# Altium PCB Player.PcbDoc (part 3 of 6)
Units mil, origin at the board's own origin, x right, y up, seen from the top; angles counter-clockwise.
Board outline 2992.13 x 3937.01 mil, 6 copper layers (Top Layer, Mid-Layer 1, Mid-Layer 2, Mid-Layer 3, Mid-Layer 4, Bottom Layer), stack 60.567 mil thick; 284 components, 323 nets, 1590 pads, 1045 vias.
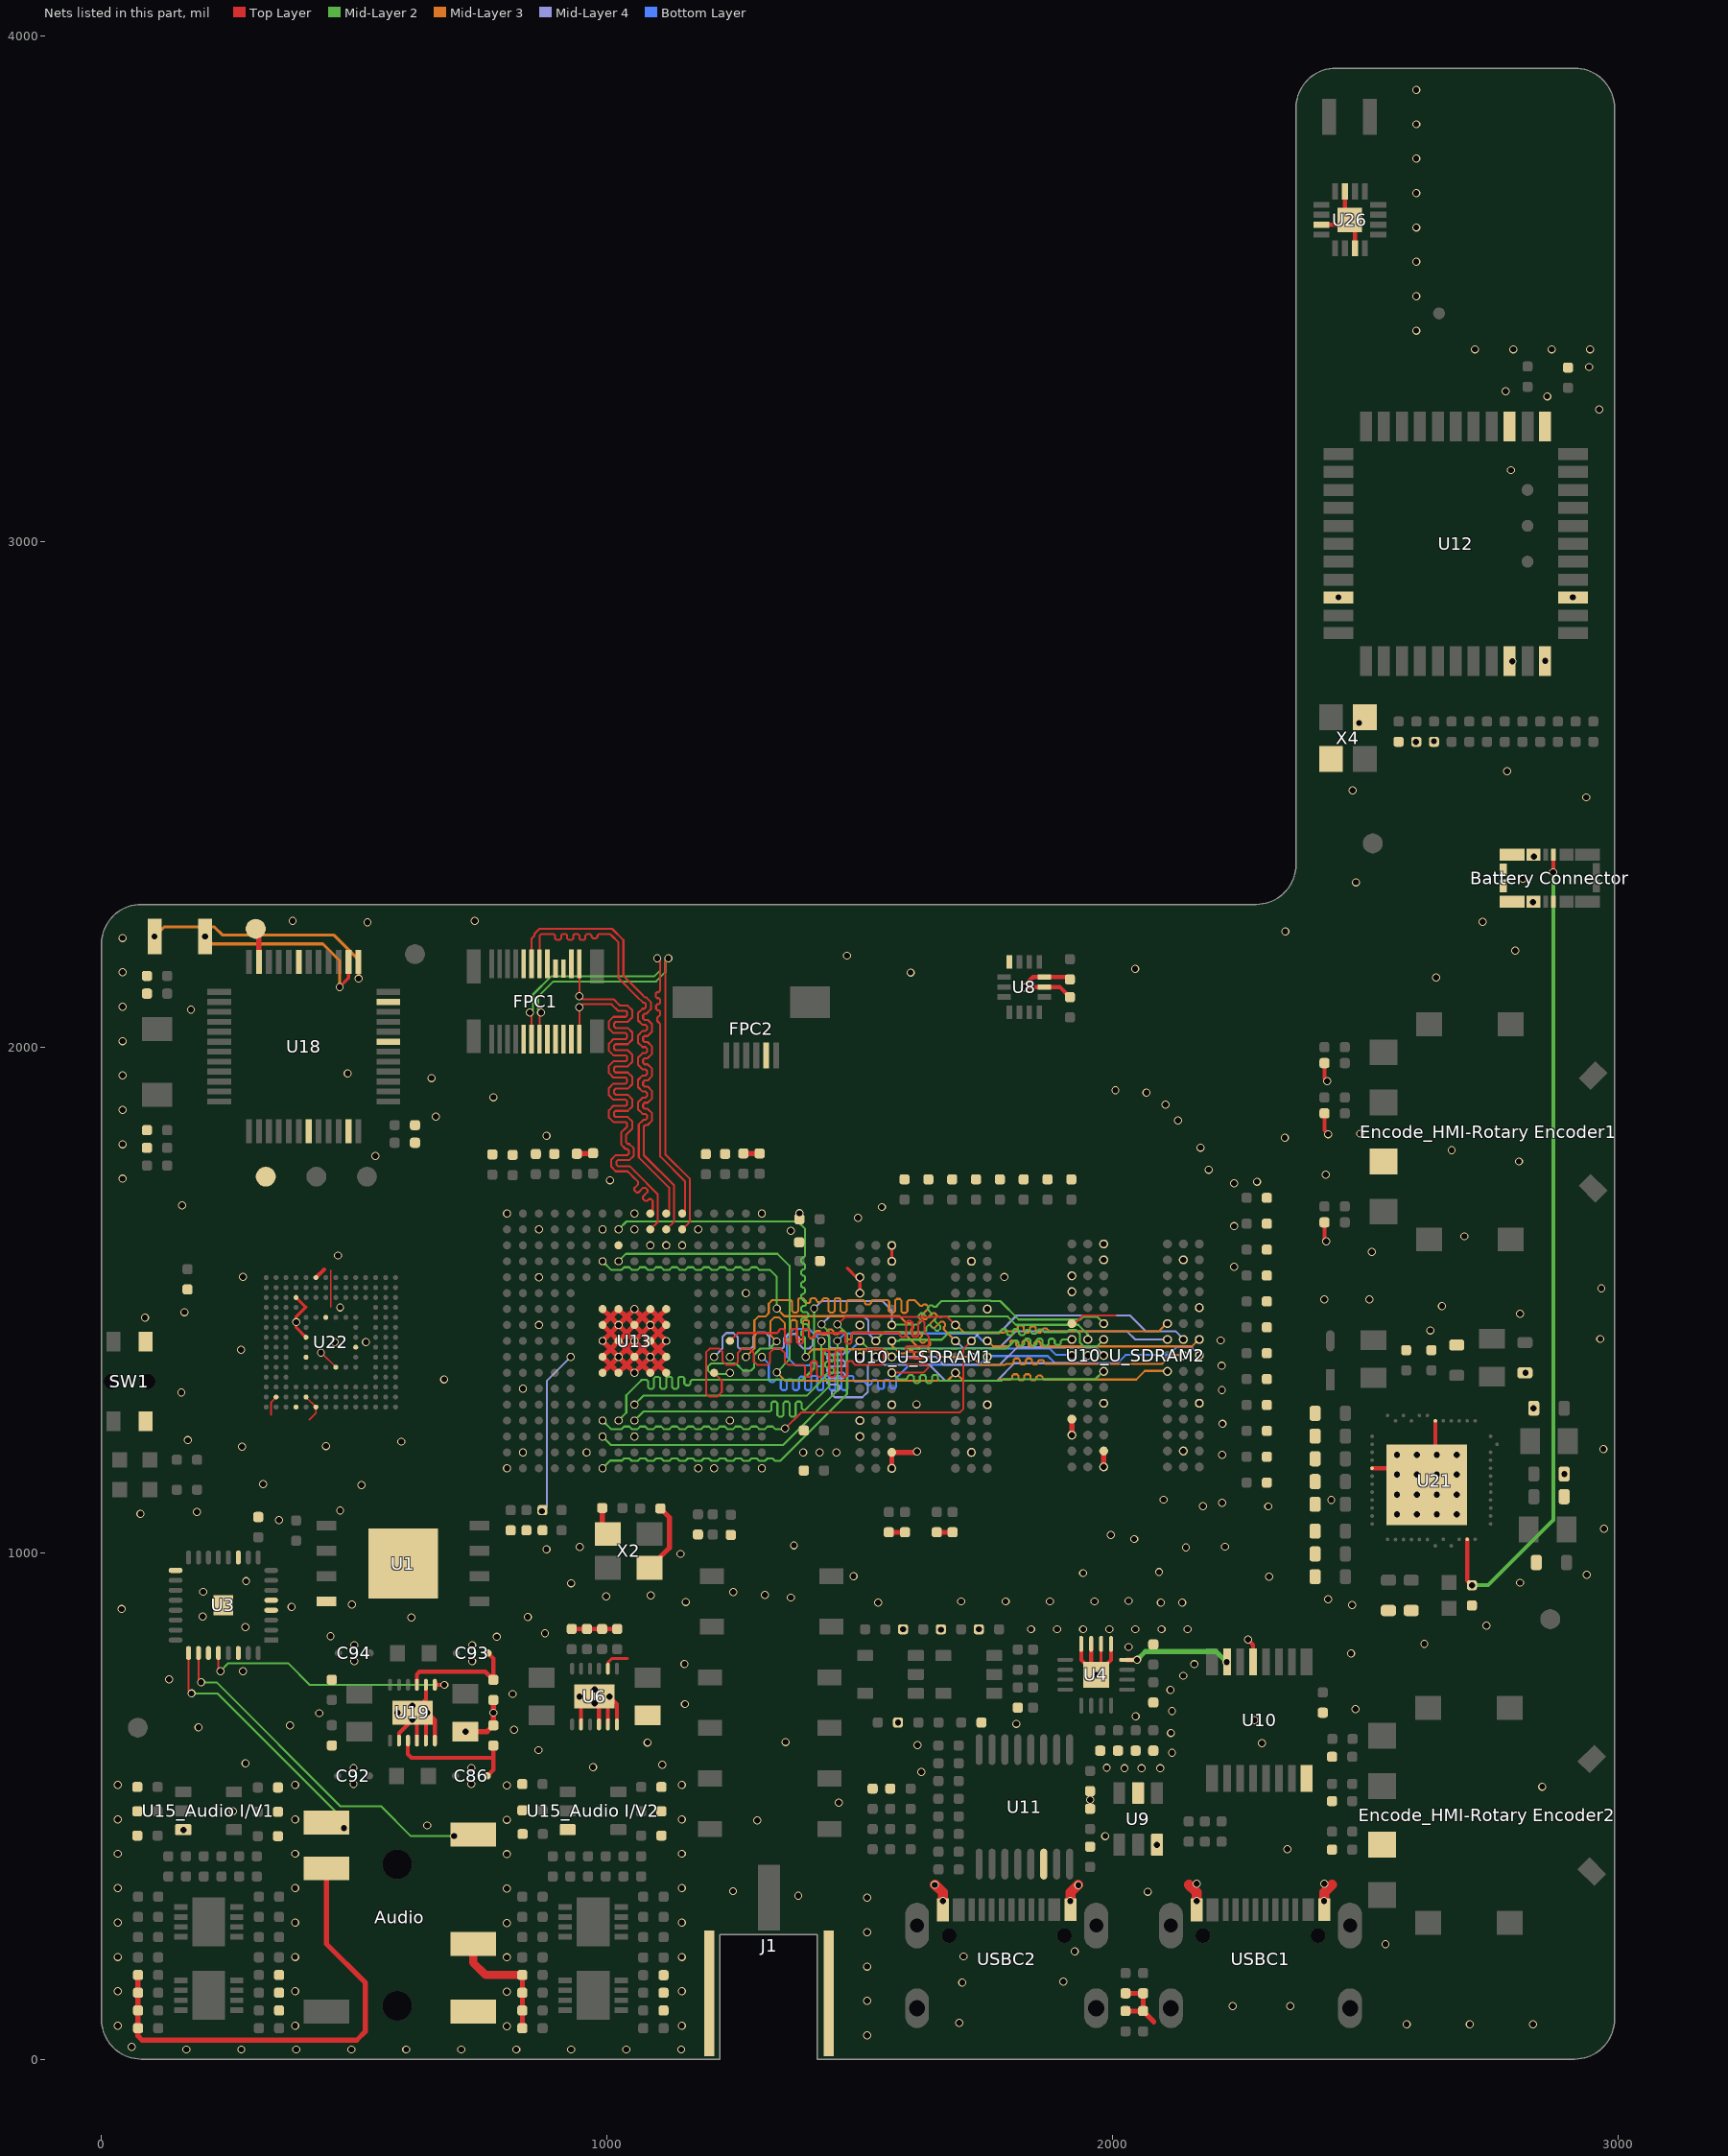
[diagram p7: the nets of this part, all layers, seen from the top]

## Via types
v1: diameter 16, hole 12, Top Layer to Bottom Layer, tented both sides, 1045 vias

## Nets (pads, with @x,y where several pads share a name; then routed paths per layer and width w, separated by ;. In a path a pad name is that pad's centre, name@x,y a point inside that pad or via, vN(x,y) a via of type N, cw(c..) or ccw(c..) an arc to the next point about the centre after c; other vN are vias at no path point) (continued)
Audio_RT1: "Battery Connector.7" "Battery Connector.8" "Battery Connector.11" "Battery Connector.12" "Battery Connector.15" "Battery Connector.16" "C1_HMI-Rotary Encoder1.2" "C1_HMI-Rotary Encoder2.2" "C2_HMI-Rotary Encoder1.2" "C2_HMI-Rotary Encoder2.2" "C3_HMI-Rotary Encoder1.2" "C3_HMI-Rotary Encoder2.2" "C40_Audio I/V1.2" "C40_Audio I/V2.2" "C53_Audio I/V1.2" "C53_Audio I/V2.2" "C72_Audio I/V1.2" "C72_Audio I/V2.2" "C73_Audio I/V1.1" "C73_Audio I/V2.1" "C77_Audio I/V1.1" "C77_Audio I/V2.1" "C78_Audio I/V1.1" "C78_Audio I/V2.1" "C83_Audio I/V1.1" "C83_Audio I/V2.1" "C84_Audio I/V1.1" "C84_Audio I/V2.1" "Encode_HMI-Rotary Encoder1.C" "Encode_HMI-Rotary Encoder2.C" "R65_Audio I/V1.2" "R65_Audio I/V2.2" "U15_Audio I/V1.3" "U15_Audio I/V2.3" Audio.1 C1.2 C2.2 C3.2 C4.2 C5.2 C6.2 C7.2 C8.2 C9.2 C10.1 C11.1 C12.1 C13.1 C14.1 C15.2 C16.1 C16_U_SDRAM1.2 C16_U_SDRAM2.2 C17.1 C17_U_SDRAM1.2 C17_U_SDRAM2.2 C18.1 C18_U_SDRAM1.2 C18_U_SDRAM2.2 C19.2 C19_U_SDRAM1.2 C19_U_SDRAM2.2 C20_U_SDRAM1.2 C20_U_SDRAM2.2 C21.1 C21_U_SDRAM1.2 C21_U_SDRAM2.2 C22.1 C22_U_SDRAM1.2 C22_U_SDRAM2.2 C23.1 C23_U_SDRAM1.2 C23_U_SDRAM2.2 C24_U_SDRAM1.2 C24_U_SDRAM2.2 C25.1 C25_U_SDRAM1.2 C25_U_SDRAM2.2 C26.1 C26_U_SDRAM1.2 C26_U_SDRAM2.2 C27_U_SDRAM1.2 C27_U_SDRAM2.2 C28.1 C29.1 C30.1 C31.2 C33.2 C34.1 C35.1 C36.1 C37.1 C38.1 C39.1 C41.2 C42.2 C43.2 C44.2 C45.2 C46.2 C47.2 C48.2 C49.2 C50.2 C51.2 C52.2 C54.2 C55.1 C56.1 C57.2 C58.1 C59.1 C60.1 C61.2 C62.2 C63.2 C64.1 C65.2 C66.2 C67.2 C68.1 C69.1 C70.1 C71.2 C79.1 C80.1 C81.1 C82.1 C86.2 C92.2 C93.2 C94.2 C95.2 FPC1.5 FPC1.8 FPC1.11 FPC1.14 FPC1.17 FPC1.20 FPC2.2 J1.2 J1.3 L7.2 L8.2 R2.2 R4.1 R7.1 R11.2 R12.1 R13.1 R14.2 R15.2 R16.2 R45.2 R48.1 R49.1 R51.2 R53.1 R64.1 SW1.2 SW1.3 TP4.1 TP7.1 U1.0 U1.4 U3.4 U3.5 U3.11 U3.17 U3.27 U3.30 U3.33 U4.13 U4.14 U4.15 U4.16 U4.17 U6.2 U6.4 U6.5 U6.6 U6.8 U6.13 U8.6 U8.7 U8.11 U9.2 U9.6 U10.8 U10.13 U10_U_SDRAM1.A3 U10_U_SDRAM1.B3 U10_U_SDRAM1.B8 U10_U_SDRAM1.C1 U10_U_SDRAM1.D1 U10_U_SDRAM1.E9 U10_U_SDRAM1.F1 U10_U_SDRAM1.L3 U10_U_SDRAM1.L9 U10_U_SDRAM1.M1 U10_U_SDRAM1.N1 U10_U_SDRAM1.P3 U10_U_SDRAM1.P8 U10_U_SDRAM1.R3 U10_U_SDRAM2.A3 U10_U_SDRAM2.B3 U10_U_SDRAM2.B8 U10_U_SDRAM2.C1 U10_U_SDRAM2.D1 U10_U_SDRAM2.E9 U10_U_SDRAM2.F1 U10_U_SDRAM2.L3 U10_U_SDRAM2.L9 U10_U_SDRAM2.M1 U10_U_SDRAM2.N1 U10_U_SDRAM2.P3 U10_U_SDRAM2.P8 U10_U_SDRAM2.R3 U11.14 U12.1 U12.3 U12.20 U12.31 U12.33 U12.36 U13.A1 U13.A17 U13.B2 U13.B6 U13.C10 U13.C13 U13.C16 U13.F2 U13.G7 U13.G8 U13.G9 U13.G10 U13.G11 U13.G16 U13.H7 U13.H8 U13.H9 U13.H10 U13.H11 U13.J3 U13.J7 U13.J8 U13.J9 U13.J10 U13.J11 U13.J16 U13.J17 U13.K7 U13.K8 U13.K9 U13.K10 U13.K11 U13.K15 U13.L7 U13.L8 U13.L9 U13.L10 U13.L11 U13.L15 U13.M15 U13.N1 U13.N16 U13.P1 U13.R4 U13.R8 U13.T12 U13.U1 U13.U17 U18.19 U18.23 U18.35 U18.47 U19.2 U19.4 U19.5 U19.6 U19.8 U19.13 U21.30 U21.41 U21.49 U22.A6 U22.C4 U22.E7 U22.G5 U22.H10 U22.J5 U22.K8 U22.N2 U22.N5 U22.P4 U22.P6 U26.3 U26.11 U26.15 U26.17 USBC1.A1 USBC1.A12 USBC1.B1 USBC1.B12 USBC2.A1 USBC2.A12 USBC2.B1 USBC2.B12 X2.2 X2.4 X4.2 X4.4 | length 4534.4
  Top Layer w3.5: 335.43,1273.68 335.43,1299.33 U22.N2@345.32,1309.22 ; U22.N5@404.37,1309.22 U22.P6@424.06,1289.53 424.06,1277.06 411,1264 ; v1(434,1397) 434.7,1397 U22.K8@463.43,1368.27 ; 453.56,1486.95 453.56,1559.57
  Top Layer w4: U10_U_SDRAM2.F1@1918.98,1454.48 1924.82,1454.48 1940.64,1470.3 2005.58,1470.3
  Top Layer w6: U22.C4@384.69,1506.07 403.76,1487 404,1487 385,1468 385,1446.7 U22.G5@404.37,1427.33 ; X2.4@1001.45,1036.4 X2.4@1003.35,1038.29 ; U6.8@1001.57,772.13 1001.57,784.57 1008.87,791.87 1040.04,791.87 ; 1475,1564 1492.86,1546.14 v1(1499.8,1546.14) v1(1499.8,1514.64) ; v1(1562.79,1577.64) v1(1562.79,1609.13) ; U4.17@1976.85,769.84 U4.14@1976.85,821.02
  Top Layer w8: U22.A6@424.06,1545.44 440.39,1561.76 ; U19.2@588.43,629.88 588.43,644.65 v1(615,671.22) 623.86,662.36 U19.4@623.86,629.88 ; U19.13@615,685 641.57,711.57 U19.8@641.57,740.12 ; U19.5@641.57,629.88 U19.13@641.57,682.05 ; v1(644.53,685) 659.29,670.24 U19.6@659.29,629.88 ; C38.1@929.96,850.59 C37.1@959.96,850.59 C55.1@1019.96,850.59 ; U6.2@948.43,661.89 U6.13@948.43,714.05 ; v1(975,703.23) 983.86,694.37 U6.4@983.86,661.89 ; U6.5@1001.57,661.89 U6.13@1001.57,714.05 ; v1(1004.53,717.01) 1019.29,702.24 U6.6@1019.29,661.89 ; C56.1@1915,2100 1895,2119.99 U8.6@1864.86,2119.99 1826.41,2119.99 v1(1825.02,2118.6) 1825.02,2122.46 1842.25,2139.68 U8.7@1864.86,2139.68 1910.32,2139.68 C58.1@1915,2135 ; U4.16@1937.48,821.02 1937.48,789.53 1957.17,769.84 U4.15@1957.17,821.02 ; U4.17@1976.85,769.84 1996.54,789.53 U4.13@1996.54,821.02 ; v1(2267.07,829.42) 2277.2,819.29 U10.13@2277.2,785.16 ; U26.15@2412.8,3627.32 2459.06,3627.32 U26.17@2468.9,3637.17 ; 2418.54,1870.04 2418.54,1836.46 v1(2426,1829) ; 2418.58,1654.53 2418.58,1620.42 v1(2422,1617) ; 2418.58,1969.49 2418.58,1939.42 v1(2424,1934) ; U26.11@2459.06,3693.27 2459.06,3647.01 U26.17@2468.9,3637.17 ; U26.3@2478.74,3581.06 2478.74,3627.32 U26.17@2468.9,3637.17 ; U21.41@2512.76,1168.5 U21.49@2549.17,1168.5 ; U21.49@2621.02,1136.02 2637.76,1152.76 U21.30@2637.76,1262.01
  Top Layer w10: TP7.1@305,2235 311.42,2228.58 U18.47@311.42,2169.33 ; v1(720,647.6) 762.6,647.6 C82.1@775,660 C81.1@775,710 ; C44.2@940,1790.22 940.5,1790.72 971.5,1790.72 C42.2@972,1791.22 ; C54.2@990.29,1089.83 990.29,1048.95 X2.4@1000.95,1038.29 ; U13.G7@990.95,1357.17 1006.69,1372.91 ; U13.G11@990.95,1483.15 1006.69,1467.4 ; X2.2@1083.63,971.36 1123.27,1011 1123.27,1070.85 C57.2@1105.29,1088.83 ; U13.L7@1116.93,1357.17 1101.18,1372.91 ; U13.L11@1116.93,1483.15 1101.18,1467.4 ; C41.2@1269.45,1790.83 C46.2@1301.45,1790.83 C46.2@1300.95,1791.33 ; C50.2@1557,1041.78 C49.2@1589,1041.78 ; v1(1562.79,1168.19) U10_U_SDRAM1.P3@1562.79,1199.68 1610.98,1199.68 v1(1612.67,1201.37) ; C52.2@1652,1041.78 C51.2@1683,1041.78 ; v1(1918.98,1234.01) U10_U_SDRAM2.M1@1918.98,1265.51 ; v1(1981.97,1171.02) U10_U_SDRAM2.P3@1981.97,1202.51 ; R16.2@2025,95 R15.2@2060,95 ; R11.2@2025,130 R14.2@2060,130 R15.2@2060,95 ; 2080.83,73.44 2080.83,74.17 R15.2@2060,95 ; 1006.69,1372.91 v1(1022.44,1388.66) ; 1006.69,1372.91 U13.H7@1022.44,1357.17 1038.19,1372.91 ; 1006.69,1372.91 U13.G8@990.95,1388.66 1006.69,1404.41 ; 1006.69,1404.41 v1(990.95,1420.16) 1006.69,1435.91 ; 1006.69,1404.41 U13.H9@1022.44,1420.16 ; 1006.69,1404.41 v1(1022.44,1388.66) ; 1006.69,1435.91 U13.G10@990.95,1451.65 1006.69,1467.4 ; 1006.69,1435.91 v1(1022.44,1451.65) ; 1006.69,1435.91 U13.H9@1022.44,1420.16 ; 1006.69,1467.4 U13.H11@1022.44,1483.15 1038.19,1467.4 ; 1006.69,1467.4 v1(1022.44,1451.65) ; v1(1022.44,1388.66) 1038.19,1404.41 ; v1(1022.44,1388.66) 1038.19,1372.91 ; U13.H9@1022.44,1420.16 1038.19,1435.91 ; U13.H9@1022.44,1420.16 1038.19,1404.41 ; v1(1022.44,1451.65) 1038.19,1467.4 ; v1(1022.44,1451.65) 1038.19,1435.91 ; 1038.19,1372.91 U13.J8@1053.94,1388.66 ; 1038.19,1372.91 v1(1053.94,1357.17) 1069.69,1372.91 ; 1038.19,1404.41 v1(1053.94,1420.16) ; 1038.19,1404.41 U13.J8@1053.94,1388.66 ; 1038.19,1435.91 U13.J10@1053.94,1451.65 ; 1038.19,1435.91 v1(1053.94,1420.16) ; 1038.19,1467.4 v1(1053.94,1483.15) 1069.69,1467.4 ; 1038.19,1467.4 U13.J10@1053.94,1451.65 ; U13.J8@1053.94,1388.66 1069.69,1404.41 ; U13.J8@1053.94,1388.66 1069.69,1372.91 ; v1(1053.94,1420.16) 1069.69,1435.91 ; v1(1053.94,1420.16) 1069.69,1404.41 ; U13.J10@1053.94,1451.65 1069.69,1467.4 ; U13.J10@1053.94,1451.65 1069.69,1435.91 ; 1069.69,1372.91 v1(1085.43,1388.66) ; 1069.69,1372.91 U13.K7@1085.43,1357.17 1101.18,1372.91 ; 1069.69,1404.41 U13.K9@1085.43,1420.16 ; 1069.69,1404.41 v1(1085.43,1388.66) ; 1069.69,1435.91 v1(1085.43,1451.65) ; 1069.69,1435.91 U13.K9@1085.43,1420.16 ; 1069.69,1467.4 U13.K11@1085.43,1483.15 1101.18,1467.4 ; 1069.69,1467.4 v1(1085.43,1451.65) ; v1(1085.43,1388.66) 1101.18,1404.41 ; v1(1085.43,1388.66) 1101.18,1372.91 ; U13.K9@1085.43,1420.16 1101.18,1435.91 ; U13.K9@1085.43,1420.16 1101.18,1404.41 ; v1(1085.43,1451.65) 1101.18,1467.4 ; v1(1085.43,1451.65) 1101.18,1435.91 ; 1101.18,1372.91 U13.L8@1116.93,1388.66 1101.18,1404.41 ; 1101.18,1404.41 v1(1116.93,1420.16) 1101.18,1435.91 ; 1101.18,1435.91 U13.L10@1116.93,1451.65 1101.18,1467.4
  Top Layer w20: v1@1648.35,344.68 1663.68,329.35 USBC2.A1@1663.68,295.51 ; USBC2.A12@1916.33,295.51 1916.33,329.35 v1@1931.66,344.68 ; 2150.27,344.68 2165.6,329.35 USBC1.A1@2165.6,295.51 ; USBC1.A12@2418.26,295.51 2418.26,329.35 2433.59,344.68
  Mid-Layer 2 w6: v1@864.71,1451.65 v1(864.96,1451.65)
  other v1: 167.78,19 276.52,19 385.26,19 494,19 602.74,19 711.48,19 820.22,19 928.96,19 1037.69,19 1146.43,19 60,24 1514,47 801.77,65.28 32,66 382.88,66 1147.57,66 2581,69 2706,69 2831,69 1696.46,71.94 2237,105 2351,105 1514,115 801.77,133.28 32,134 382.88,134 1147.57,134 1702.26,151.2 1902,153 1514,183 801.77,201.28 32,202 382.88,202 1147.57,202 1705,203 1924.5,212.96 2539.09,227.33 1514,251 801.77,269.28 32,270 382.88,270 1147.57,270 1663.87,312.59 1915.84,312.65 2165.8,312.59 2417.77,312.65 1514,319 1378,323 2069,331 1249,332 801.77,337.28 32,338 382.88,338 1147.57,338 1931.86,344.05 1647.95,344.55 2166.09,346.87 2418.06,346.81 801.77,405.28 32,406 382.88,406 1147.57,406 2345,415 2087.4,423.82 1985,441 162,453 644,462 1297,472 801.77,473.28 32,474 382.88,474 1147.57,474 260,490 1458,507 1955,513 2849.27,538.72 801.77,541.28 32,542 382.88,542 1147.57,542 498.5,544.25 731.5,544.25 1621,568 2023,575 2057,575 2094,575 498.5,575.75 731.5,575.75 1988,576 972,577 1109,582 285,585 2117,606 864,611 1614,621 2295,625 1080,626 1353,627 2115,645 816,651 192,656 373,660 1809,663 1575.2,665.59 2280,670 2045,678 431,684 585.47,685 775,685 2117,688 2480,692 615,698.78 1154,702 945.47,717.01 813,722 2114,730 975,730.79 134,751 2139,758 1967.01,760 279.79,766.9 1153,781 2160.98,780.89 500,787.13 732.99,787.13 2471,802 2031,815 500,818.62 732.99,818.62 2616,821 782,835 453,836 877,842 1659.91,848.98 1585,850 1735,850 1838.2,850 1889.8,850 1941.39,850 1992.99,850 2044.59,850 2096.19,850 2147.79,850 284.69,854.1 2739,857 613,873 843,874 200,875 40,890 376,894 2473,898 495,899 1535.67,902.63 2095,903 2136.97,902.63 1155.33,904.03 1700,905.01 1787.92,905.01 1875.84,905.01 1963.76,905.01 2031,906 2425.87,909.03 1363.35,912.71 998,915 1086,917 1312,918 201,924 1249.47,923.37 929,941 2805,942 286,945 2309,954 1487.16,954.88 2937,958 1941.34,961.09 2091.31,963.06 1145,999 880,1008 2144.49,1011.69 946,1013 2221.78,1013.2 1369.49,1015.94 2042.13,1028.42 1995.87,1036.3 2971,1049 351,1066 2561.97,1076.97 2601.34,1076.97 2640.71,1076.97 2680.08,1076.97 77.24,1078.35 189,1082 472,1085 2307.58,1092.94 2177.95,1093.39 2216.34,1100.28 2100.2,1106.18 2432,1105.9 2561.97,1116.34 2601.34,1116.34 2640.71,1116.34 2680.08,1116.34 514,1135 320,1137 2561.97,1155.71 2601.34,1155.71 2640.71,1155.71 2680.08,1155.71 2893,1157 801.97,1168.19 1179.92,1168.19 1211.42,1168.19 1305.91,1168.19 2216.34,1194.76 2561.97,1195.08 2601.34,1195.08 2640.71,1195.08 2680.08,1195.08 833.46,1199.68 959.45,1199.68 1387.6,1199.68 1420.08,1199.68 1453.54,1199.68 1720.27,1199.68 2139.45,1202.51 2970,1206 278,1211 444.26,1212.27 592.83,1220.94 171.06,1223.98 1053.94,1231.18 1499.8,1231.18 2216.67,1256.19 1242.91,1262.68 1499.8,1262.68 2832,1287 1562.79,1294.17 1751.76,1294.17 1611.71,1294.83 1981.97,1297 2170.94,1297 158,1318 2215.7,1322.76 833.46,1325.67 677.76,1344.19 2816,1357 2215.35,1370.94 1242.91,1388.66 275.8,1402.77 461,1418 523.07,1417.61 2213.39,1421.14 2964,1424 2628,1441 1499.8,1451.65 385,1457.35 86,1466 2805,1474 164,1477 1751.76,1483.15 2170.94,1485.98 472.02,1486.47 2651,1489 2418,1502 2507.35,1502.28 1274.41,1514.65 1918.98,1517.47 2966,1524 864.96,1546.14 280,1547 1785.24,1546.5 1918.98,1548.97 2240,1567.01 1720.27,1577.64 1981.97,1580.47 2139.45,1580.47 468,1589 2512,1596 1085.43,1609.13 1116.93,1609.13 1148.43,1609.13 1981.97,1611.96 2695,1627 1363.12,1637.83 864.96,1640.63 990.95,1640.63 1053.94,1640.63 1179.92,1640.63 2240,1647.01 1495.87,1663.27 801.97,1672.13 1053.94,1672.13 1305.91,1672.13 1380.36,1672.63 1543.11,1684.92 159.08,1688.19 2240,1732.01 2285,1735 1005.44,1737.89 42,1741 2421,1749 2189.76,1758.74 2803,1775 542,1786 2670,1797 2173.54,1802.44 42,1809 2340,1822 880,1826 2489,1830 2129.05,1856.01 661,1864 42,1877 2104.13,1887.68 775,1902 2066.59,1910.93 2005,1916 653,1940 42,1945 487,1949 42,2013 177,2075 42,2081 2639,2139 42,2149 1600.1,2148.65 2044,2156 1474,2182 2796,2192 42,2217 2341,2230 526,2248 2731,2249 378,2251 738,2251 2831,2288 2481,2327 2811,2334 2833,2378 2936,2495 2474,2509 2779.61,2546.51 2599.46,2604.8 2635,2606 2487,2642 2790.21,2764.19 2855,2764.71 2446.13,2890.58 2909.87,2890.58 2787,3142 2962,3262 2859,3288 2777,3298 2942,3346 2716,3381 2792,3381 2868,3381 2944,3381 2600,3418 2600,3486 2600,3554 2600,3622 2600,3690 2600,3758 2600,3826 2600,3894
Audio_SW1: Audio.6 U3.25 | length 503.8
  Top Layer w4: U3.25@172.17,803.01 172.17,728.83 v1(178,723)
  Mid-Layer 2 w4: v1(178,723) 229.78,723 479.68,473.09 v1(479.68,456.91)
Audio_SW2: Audio.5 U3.26 | length 686.1
  Top Layer w4: U3.26@191.86,803.01 191.86,750.14 v1(197,745)
  Mid-Layer 2 w4: v1(197,745) 227.78,745 472.78,500 553,500 612,441 v1(697,441)
Audio_VO1: "C76_Audio I/V1.1" "R56_Audio I/V1.2" "R57_Audio I/V1.2" "R61_Audio I/V1.1" Audio.4 | length 935
  Top Layer w10: 72.28,166.18 72.28,131.18 72.28,96.18 72.28,61.18 72.28,45.72 80.51,37.49 504.78,37.49 522,54.71 522,151 445,228 Audio.4@445,377.12
Audio_VO2: "C76_Audio I/V2.1" "R56_Audio I/V2.2" "R57_Audio I/V2.2" "R61_Audio I/V2.1" Audio.3 | length 249.1
  Top Layer w10: 832.28,61.18 832.28,96.18 832.28,131.18 832.28,166.18
  Top Layer w16: Audio.3@735,227.52 735,191 759.82,166.18 832.28,166.18
AudioPWR_EN: U3.28 U19.7 | length 523.8
  Top Layer w4: U3.28@231.24,803.01 231.24,770.76 v1(235,767)
  Top Layer w8: U19.7@659.29,740.12 677.88,740.12 v1(678,740)
  Mid-Layer 2 w4: v1(235,767) 251,783 369,783 412,740 v1(678,740)
BATT_ID: "Battery Connector.4"
BATT_TS: "Battery Connector.3" R2.1 U21.11 | length 1624.4
  Top Layer w8: U21.11@2700.75,1027.76 2700.75,946.26 R2.1@2710,937.01 ; 2870.94,2382.01 2870.94,2347.06 v1(2871,2347)
  Mid-Layer 2 w8: v1(2710.59,937.13) 2742.13,937.13 2871,1066 v1(2871,2347)
BOOT: R7.2 U13.E8 | length 328.7
  Mid-Layer 4 w4: v1(871.14,1083.51) 881,1093.37 881,1341.71 v1(927.95,1388.66)
Connected_LED: U18.43
COV_EN: U4.12 U10.15 | length 212.6
  Top Layer w10: U4.12@2028.03,789.53 2047.72,789.53 v1(2047.81,789.44)
  Mid-Layer 2 w10: v1(2047.81,789.44) 2064.38,806 2204,806 v1(2225,785)
DBG_CLK: TP6.1 U18.38 | length 394.5
  Top Layer w6: v1(471,2120) 488.58,2137.58 U18.38@488.58,2169.33
  Mid-Layer 3 w6: v1(205,2220) 219.72,2205.28 437.72,2205.28 471,2172 v1(471,2120)
DBG_DIO: TP5.1 U18.37 | length 508.1
  Top Layer w6: U18.37@508.27,2169.33 508.27,2136.69 v1(508.37,2136.59)
  Mid-Layer 3 w6: v1(105,2220) 124,2239 223,2239 239,2223 459,2223 508.37,2173.63 v1(508.37,2136.59)
DCDC_VCC_Audio: C82.2 C86.1 U19.3 | length 263.8
  Top Layer w8: U19.3@606.14,629.88 606,629.74 606,603 613,596 775,596 ; C86.1@762.99,560 775,572.01 775,596 ; C82.2@775,620 775,596
DCDC_VEE_Audio: C81.2 C93.1 U19.9 | length 237.9
  Top Layer w8: U19.9@623.86,740.12 623.86,760.86 629,766 759,766 C81.2@775,750 775,792.36 C93.1@764.49,802.87
Debuger_LED: U18.31
DSI_CK_N: FPC1.18 U13.L17 | length 984.2
  Top Layer w4: FPC1.18@866.26,2166.14 866.26,2221.26 870,2225 880,2225 894,2225 897,2222 897,2216 900,2213 906,2213 909,2216 909,2222 912,2225 918,2225 921,2222 921,2216 924,2213 930,2213 933,2216 933,2222 936,2225 942,2225 945,2222 945,2216 948,2213 954,2213 957,2216 957,2222 960,2225 966,2225 969,2222 969,2219.31 972,2216.31 978,2216.31 981,2219.31 981,2222 984,2225 1005.86,2225 1009.91,2220.95 1022.07,2208.79 1022.07,2137.93 1025,2135 1059,2101 1070.83,2089.17 1073.58,2089.17 1076.58,2086.17 1076.58,2080.17 1073.58,2077.17 1069.86,2077.17 1061,2068.32 1061,2054.03 1069.86,2045.17 1075.82,2045.17 1078.82,2042.17 1078.82,2036.17 1075.82,2033.17 1069.86,2033.17 1061,2024.32 1061,2010.03 1069.86,2001.17 1075.82,2001.17 1078.82,1998.17 1078.82,1992.17 1075.82,1989.17 1069.86,1989.17 1061,1980.32 1061,1966.03 1069.86,1957.17 1075.82,1957.17 1078.82,1954.17 1078.82,1948.17 1075.82,1945.17 1069.86,1945.17 1061,1936.32 1061,1922.03 1069.86,1913.17 1075.82,1913.17 1078.82,1910.17 1078.82,1904.17 1075.82,1901.17 1069.86,1901.17 1061,1892.32 1061,1878.03 1069.86,1869.17 1075.82,1869.17 1078.82,1866.17 1078.82,1860.17 1075.82,1857.17 1071.46,1857.17 1062.6,1848.32 1062.6,1827.17 1062.6,1783.25 1122.47,1723.39 1122.47,1677.66 U13.L17@1116.93,1672.13
DSI_CK_P: FPC1.19 U13.L16 | length 994.1
  Top Layer w4: FPC1.19@850.51,2166.14 850.51,2215.51 856.26,2221.26 856.26,2225.4 865.86,2235 1010,2235 1032.07,2212.93 1032.07,2142.07 1067.04,2107.1 1074.97,2099.17 1077.73,2099.17 1086.58,2090.32 1086.58,2076.03 1077.73,2067.17 1074,2067.17 1071,2064.17 1071,2058.17 1074,2055.17 1079.97,2055.17 1088.82,2046.32 1088.82,2032.03 1079.97,2023.17 1074,2023.17 1071,2020.17 1071,2014.17 1074,2011.17 1079.97,2011.17 1088.82,2002.32 1088.82,1988.03 1079.97,1979.17 1074,1979.17 1071,1976.17 1071,1970.17 1074,1967.17 1079.97,1967.17 1088.82,1958.32 1088.82,1944.03 1079.97,1935.17 1074,1935.17 1071,1932.17 1071,1926.17 1074,1923.17 1079.97,1923.17 1088.82,1914.32 1088.82,1900.03 1079.97,1891.17 1074,1891.17 1071,1888.17 1071,1882.17 1074,1879.17 1079.97,1879.17 1088.82,1870.32 1088.82,1856.03 1079.97,1847.17 1075.6,1847.17 1072.6,1844.17 1072.6,1827.17 1072.6,1787.4 1132.47,1727.53 1132.47,1656.17 U13.L16@1116.93,1640.63
DSI_D0_N: FPC1.6 U13.M17 | length 942.8
  Top Layer w4: v1(847.39,2069.37) 850.51,2066.25 FPC1.6@850.51,2017.01 ; v1(1099,2177) 1105,2171 1105,2127 1105,2113 1102,2110 1098.97,2110 1095.97,2107 1095.97,2101 1098.97,2098 1102,2098 1105,2095 1105,2089 1102,2086 1099.58,2086 1096.58,2083 1096.58,2077 1099.58,2074 1102,2074 1105,2071 1105,2065 1102,2062 1099,2059 1099,2053 1102,2050 1105,2047 1105,2024 1105,1785 1153.82,1736.18 1153.82,1677.52 U13.M17@1148.43,1672.13
  Mid-Layer 2 w4: v1(847.39,2069.37) 853.39,2075.37 853.39,2105.14 889.24,2141 1092.72,2141 1105,2153.28 v1@1105,2177
DSI_D0_P: FPC1.7 U13.M16 | length 952.6
  Top Layer w4: FPC1.7@866.26,2017.01 866.26,2066.25 v1(869.39,2069.37) ; v1(1121,2177) 1115,2171 1115,1963.4 1115,1806.53 1115,1789.14 1163.82,1740.33 1163.82,1656.02 U13.M16@1148.43,1640.63
  Mid-Layer 2 w4: v1(869.39,2069.37) 863.39,2075.37 863.39,2101 893.39,2131 1096.86,2131 1115,2149.14 v1@1115,2177
DSI_D1_N: FPC1.12 U13.K17 | length 995.4
  Top Layer w4: FPC1.12@945,2017.01 v1(945,2080) 951,2086 1008.47,2086 1009.47,2085.01 1021.47,2073.01 1036.6,2073.01 1039.6,2070.01 1039.6,2064.01 1036.6,2061.01 1012.44,2061.01 1003.58,2052.15 1003.58,2037.87 1012.44,2029.01 1036.6,2029.01 1039.6,2026.01 1039.6,2020.01 1036.6,2017.01 1012.44,2017.01 1003.58,2008.15 1003.58,1993.87 1012.44,1985.01 1036.6,1985.01 1039.6,1982.01 1039.6,1976.01 1036.6,1973.01 1012.44,1973.01 1003.58,1964.15 1003.58,1949.87 1012.44,1941.01 1036.6,1941.01 1039.6,1938.01 1039.6,1932.01 1036.6,1929.01 1012.44,1929.01 1003.58,1920.15 1003.58,1905.87 1012.44,1897.01 1036.6,1897.01 1039.6,1894.01 1039.6,1888.01 1036.6,1885.01 1012.44,1885.01 1003.58,1876.15 1003.58,1861.87 1012.44,1853.01 1036.6,1853.01 1039.6,1850.01 1039.6,1844.01 1036.6,1841.01 1036.46,1841.01 1027.6,1832.15 1027.6,1821.44 1027.6,1817.57 1027.6,1808.5 1036.46,1799.64 1039.71,1799.64 1042.71,1796.64 1042.71,1790.64 1039.71,1787.64 1016.97,1787.64 1008.11,1778.79 1008.11,1764.5 1016.97,1755.64 1040.21,1755.64 1047.25,1748.61 1051.54,1744.31 1061.44,1734.42 1061.44,1730.17 1053.65,1722.38 1053.65,1718.13 1057.89,1713.89 1062.13,1713.89 1071.34,1723.1 1075.59,1723.1 1079.83,1718.86 1079.83,1714.62 1070.62,1705.41 1070.62,1701.16 1074.86,1696.92 1079.1,1696.92 1082.76,1700.58 1087,1700.58 1090,1697.58 1090,1686.17 1090,1676.69 U13.K17@1085.43,1672.13
DSI_D1_P: FPC1.13 U13.K16 | length 999
  Top Layer w4: FPC1.13@945,2166.14 v1(945,2102) 951,2096 1012.62,2096 1023.61,2085.01 1025.61,2083.01 1040.75,2083.01 1049.6,2074.15 1049.6,2059.87 1040.75,2051.01 1016.58,2051.01 1013.58,2048.01 1013.58,2042.01 1016.58,2039.01 1040.75,2039.01 1049.6,2030.15 1049.6,2015.87 1040.75,2007.01 1016.58,2007.01 1013.58,2004.01 1013.58,1998.01 1016.58,1995.01 1040.75,1995.01 1049.6,1986.15 1049.6,1971.87 1040.75,1963.01 1016.58,1963.01 1013.58,1960.01 1013.58,1954.01 1016.58,1951.01 1040.75,1951.01 1049.6,1942.15 1049.6,1927.87 1040.75,1919.01 1016.58,1919.01 1013.58,1916.01 1013.58,1910.01 1016.58,1907.01 1040.75,1907.01 1049.6,1898.15 1049.6,1883.87 1040.75,1875.01 1016.58,1875.01 1013.58,1872.01 1013.58,1866.01 1016.58,1863.01 1040.75,1863.01 1049.6,1854.15 1049.6,1839.87 1040.75,1831.01 1040.6,1831.01 1037.6,1828.01 1037.6,1821.44 1037.6,1817.57 1037.6,1812.64 1040.6,1809.64 1043.85,1809.64 1052.71,1800.79 1052.71,1786.5 1043.85,1777.64 1021.11,1777.64 1018.11,1774.64 1018.11,1768.64 1021.11,1765.64 1044.36,1765.64 1054.71,1755.29 1100,1710 1100,1655.2 U13.K16@1085.43,1640.63
DSI_D2_N: FPC1.9
DSI_D2_P: FPC1.10
DSI_D3_N: FPC1.15
DSI_D3_P: FPC1.16
FMC_A0: U10_U_SDRAM1.G8 U10_U_SDRAM2.G8 U13.G4 | length 1377.6
  Top Layer w4: v1(1352.17,1246.93) 1383.78,1278.55 1696.78,1278.55 1704.5,1286.28 1704.5,1404.39 v1(1720.27,1420.16)
  Mid-Layer 2 w4: v1(990.95,1262.68) 1007.68,1245.94 1028.83,1245.94 1033.71,1250.83 1043.83,1250.83 1048.71,1245.94 1060.32,1245.94 1065.2,1250.83 1075.32,1250.83 1079.03,1247.12 ; 1079.59,1246.56 1080.2,1245.94 1091.82,1245.94 1096.7,1250.83 1106.82,1250.83 1111.7,1245.94 1123.32,1245.94 1128.2,1250.83 1138.32,1250.83 1143.2,1245.94 1154.81,1245.94 1159.69,1250.83 1169.81,1250.83 1174.69,1245.94 1186.31,1245.94 1191.19,1250.83 1201.31,1250.83 1206.19,1245.94 1217.8,1245.94 1222.69,1250.83 1232.8,1250.83 1237.69,1245.94 1249.3,1245.94 1254.18,1250.83 1264.3,1250.83 1269.18,1245.94 1280.8,1245.94 1285.68,1250.83 1295.8,1250.83 1300.68,1245.94 1312.29,1245.94 1317.17,1250.83 1327.29,1250.83 1332.17,1245.94 1351.18,1245.94 v1(1352.17,1246.93)
  Mid-Layer 4 w4: v1(1720.27,1420.16) 1735.28,1435.16 1774.49,1435.16 1809.67,1470.35 2034.25,1470.35 2065.75,1438.86 ; 2065.75,1439.3 2124.11,1439.3 2139.45,1423.97 v1(2139.45,1422.99)
FMC_A1: U10_U_SDRAM1.G9 U10_U_SDRAM2.G9 U13.G3 | length 1399.7
  Mid-Layer 2 w4: v1(990.95,1231.18) 1007.68,1214.45 1348.23,1214.45 1455.51,1321.73 v1(1455.51,1420.16)
  Mid-Layer 3 w4: v1(1751.76,1420.16) 1752.75,1420.16 1763.61,1409.29 1792.13,1409.29 1794.13,1409.29 1797.13,1412.29 1797.13,1418.29 1800.13,1421.29 1806.13,1421.29 1809.13,1418.29 1809.13,1412.2 1812.13,1409.2 1818.13,1409.2 1821.13,1412.2 1821.13,1418.29 1824.13,1421.29 1830.13,1421.29 1833.13,1418.29 1833.13,1412.2 1836.13,1409.2 1842.13,1409.2 1845.13,1412.2 1845.13,1416.38 1848.13,1419.38 1854.13,1419.38 1857.13,1416.38 1857.13,1412.29 1860.13,1409.29 1898.43,1409.29 2156.26,1409.29 2169.95,1422.99 v1(2170.94,1422.99)
  Bottom Layer w4: v1(1455.51,1420.16) 1470.28,1434.92 1728.15,1434.92 1742.91,1420.16 v1(1751.76,1420.16)
FMC_A2: U10_U_SDRAM1.F7 U10_U_SDRAM2.F7 U13.G1 | length 1451.9
  Top Layer w4: v1(1455.51,1452.64) 1470.28,1467.4 1673.02,1467.4 v1(1688.77,1451.65)
  Mid-Layer 2 w4: v1(990.95,1168.19) 1006.2,1183.45 1029.32,1183.45 1033.71,1187.83 1043.83,1187.83 1048.71,1182.95 1060.32,1182.95 1065.2,1187.83 1075.32,1187.83 1079.03,1184.12 ; 1079.59,1183.57 1080.2,1182.95 1091.82,1182.95 1096.7,1187.83 1106.82,1187.83 1111.7,1182.95 1123.32,1182.95 1128.2,1187.83 1138.32,1187.83 1143.2,1182.95 1154.81,1182.95 1159.69,1187.83 1169.81,1187.83 1174.69,1182.95 1186.31,1182.95 1191.19,1187.83 1201.31,1187.83 1206.19,1182.95 1217.8,1182.95 1222.69,1187.83 1232.8,1187.83 1237.69,1182.95 1249.3,1182.95 1254.18,1187.83 1264.3,1187.83 1269.18,1182.95 1280.8,1182.95 1285.68,1187.83 1295.8,1187.83 1300.68,1182.95 1312.29,1182.95 1317.17,1187.83 1327.29,1187.83 1332.17,1182.95 1342.32,1182.95 1474.21,1314.84 1474.21,1433.94 v1(1455.51,1452.64)
  Mid-Layer 3 w4: v1(1688.77,1451.65) 1690.74,1451.65 1705.82,1436.57 1784.92,1436.57 1787.18,1438.83 1806.89,1438.83 1808.89,1438.83 1811.89,1441.83 1811.89,1447.83 1814.89,1450.83 1820.89,1450.83 1823.89,1447.83 1823.89,1439.58 1826.89,1436.58 1832.89,1436.58 1835.89,1439.58 1835.89,1445.86 1838.89,1448.86 1844.89,1448.86 1847.89,1445.86 1847.89,1439.58 1850.89,1436.58 1856.89,1436.58 1859.89,1439.58 1859.89,1441.84 1862.89,1444.84 1868.89,1444.84 1871.89,1441.84 1874.89,1438.83 1909.25,1438.83 2090.34,1438.83 2105.98,1454.48 v1(2107.95,1454.48)
FMC_A3: U10_U_SDRAM1.F3 U10_U_SDRAM2.F3 U13.H4 | length 1405.7
  Mid-Layer 2 w4: v1(1022.44,1262.68) 1037.92,1278.15 1037.92,1312.6 1063.71,1338.39 1068.7,1343.39 1077.71,1343.39 1080.71,1340.39 1080.71,1328.56 1083.71,1325.56 1089.71,1325.56 1092.71,1328.56 1092.71,1346.39 1095.71,1349.39 1101.71,1349.39 1104.71,1346.39 1104.71,1328.56 1107.71,1325.56 1113.71,1325.56 1116.71,1328.56 1116.71,1346.39 1119.71,1349.39 1125.71,1349.39 1128.71,1346.39 1128.71,1328.56 1131.71,1325.56 1137.71,1325.56 1140.71,1328.56 1140.71,1346.39 1143.71,1349.39 1149.71,1349.39 1152.71,1346.39 1152.71,1335.46 1155.71,1332.46 1161.71,1332.46 1164.71,1335.46 1164.71,1340.39 1167.71,1343.39 1213.71,1343.39 1386.61,1343.39 1409.25,1366.02 v1(1409.25,1484.13) ; v1(1562.79,1451.65) 1563.78,1452.63 1615.14,1452.63 1618.99,1456.48 1620.41,1457.89 1620.41,1462.14 1616.16,1466.38 1616.16,1470.62 1620.41,1474.87 1624.65,1474.87 1632.95,1466.57 1637.19,1466.57 1641.43,1470.81 1641.43,1475.05 1634.23,1482.25 1634.23,1486.5 1638.47,1490.74 1642.72,1490.74 1645.86,1487.59 1650.11,1487.59 1657.58,1495.07 1661.33,1498.82 1713.04,1498.82 1713.85,1499.63 1758.18,1499.63 1759,1498.82 1777.47,1498.82 1813.86,1462.43 1935.78,1462.43 1940.82,1467.48 1969.95,1467.48 1981.97,1455.46 v1(1981.97,1454.48)
  Mid-Layer 4 w4: v1(1409.25,1484.13) 1424.02,1498.9 1544.59,1498.9 1562.79,1480.7 v1(1562.79,1451.65)
FMC_A4: U10_U_SDRAM1.G1 U10_U_SDRAM2.G1 U13.J5 | length 1377.7
  Mid-Layer 2 w4: v1(1053.94,1294.17) 1071.65,1311.89 1394.49,1311.89 1423.59,1340.99 v1(1423.59,1419.51) ; v1(1499.8,1420.16) 1500.79,1420.16 1515.72,1405.23 1789.79,1405.23 1799.06,1414.5 1805.81,1421.25 1810.06,1421.25 1813.06,1418.25 1813.06,1413.99 1816.06,1410.99 1822.06,1410.99 1825.06,1413.99 1825.06,1421.48 1828.06,1424.48 1834.06,1424.48 1837.06,1421.48 1837.06,1413.99 1840.06,1410.99 1846.06,1410.99 1849.06,1413.99 1849.06,1421.48 1852.06,1424.48 1858.06,1424.48 1861.06,1421.48 1861.06,1413.99 1864.06,1410.99 1870.06,1410.99 1873.06,1413.99 1873.06,1421.48 1876.06,1424.48 1882.06,1424.48 1885.06,1421.48 1885.06,1415.13 1888.06,1412.13 1894.06,1412.13 1897.06,1415.13 1897.06,1419.99 1900.06,1422.99 1906.11,1422.99 v1(1918.98,1422.99)
  Bottom Layer w4: v1(1423.59,1419.51) 1399.27,1443.83 1368.84,1443.83 1355.71,1430.7 1355.71,1388.3 1371.99,1372.02 1392.93,1372.02 1399.35,1372.02 1402.35,1375.02 1405.35,1378.02 1411.35,1378.02 1414.35,1375.02 1414.35,1372.57 1417.35,1369.57 1423.35,1369.57 1426.35,1372.57 1426.35,1391.55 1429.35,1394.55 1435.35,1394.55 1438.35,1391.55 1438.35,1372.57 1441.35,1369.57 1447.35,1369.57 1450.35,1372.57 1450.35,1392.27 1453.35,1395.27 1459.35,1395.27 1462.35,1392.27 1462.35,1372.57 1465.35,1369.57 1471.35,1369.57 1474.35,1372.57 1474.35,1394.71 1476.35,1396.71 v1(1499.8,1420.16)
FMC_A5: U10_U_SDRAM1.G2 U10_U_SDRAM2.G2 U13.J4 | length 1402.5
  Mid-Layer 2 w4: v1(1053.94,1262.68) 1071.65,1280.39 1319.71,1280.39 1321.71,1280.39 1324.71,1283.39 1324.71,1297.18 1327.71,1300.18 1333.71,1300.18 1336.71,1297.18 1336.71,1273.51 1339.71,1270.51 1345.71,1270.51 1348.71,1273.51 1348.71,1297.18 1351.71,1300.18 1357.71,1300.18 1360.71,1297.18 1360.71,1273.51 1363.71,1270.51 1369.71,1270.51 1372.71,1273.51 1372.71,1297.18 1375.71,1300.18 1381.71,1300.18 1384.71,1297.18 1384.71,1286.76 1387.71,1283.76 1391.95,1283.76 1395.71,1287.52 1438.98,1330.79 1438.98,1338.39 1438.98,1340.39 1435.98,1343.39 1434.09,1343.39 1431.09,1346.39 1431.09,1352.39 1434.09,1355.39 1445.01,1355.39 1448.01,1358.39 1448.01,1364.39 1445.01,1367.39 1434.09,1367.39 1431.09,1370.39 1431.09,1376.39 1434.09,1379.39 1445.01,1379.39 1448.01,1382.39 1448.01,1388.39 1445.01,1391.39 1434.09,1391.39 1431.09,1394.39 1431.09,1400.39 1434.09,1403.39 1435.98,1403.39 1438.98,1406.39 1438.98,1433.09 1438.98,1437.67 v1(1424.02,1452.64) ; v1(1531.29,1420.16) 1531.29,1421.14 1547.53,1437.38 1623.49,1437.38 1628.09,1437.38 1631.09,1440.38 1631.09,1447.09 1635.33,1451.33 1639.57,1451.33 1650.55,1440.36 1654.79,1440.36 1659.04,1444.6 1659.04,1448.84 1648.16,1459.72 1648.16,1463.97 1652.4,1468.21 1656.64,1468.21 1657.31,1467.54 1661.55,1467.54 1662.31,1468.31 1680.75,1468.31 1792.24,1468.31 1808.48,1452.07 1931.69,1452.07 1950.47,1433.29 v1(1950.47,1422.99)
  Mid-Layer 4 w4: v1(1424.02,1452.64) 1440.99,1469.61 1507,1469.61 1516.38,1460.23 1516.38,1435.07 v1(1531.29,1420.16) v1@1526.62,1424.83 ; v1(1950.47,1422.99) 1951.45,1423.97 v1@1955.58,1423.97
FMC_A6: U10_U_SDRAM1.G3 U10_U_SDRAM2.G3 U13.R7 | length 1439.5
  Mid-Layer 2 w4: v1(1242.91,1357.17) 1240.18,1354.43 1206.44,1354.43 1199.36,1361.52 1199.36,1369.22 1205.79,1375.65 1254.75,1375.65 1269.3,1361.1 1283.98,1361.1 1290.58,1367.7 1290.58,1392.59 1303.12,1405.13 1321.15,1405.13 v1(1335.32,1419.3) ; v1(1562.79,1420.16) 1563.13,1420.49 1576.79,1420.49 1578.79,1422.49 1661.59,1422.49 1676.27,1437.17 1773.43,1437.17 1775.43,1437.17 1778.43,1440.17 1778.43,1440.51 1781.43,1443.51 1787.43,1443.51 1790.43,1440.51 1790.43,1434.48 1793.43,1431.48 1799.43,1431.48 1802.43,1434.48 1802.43,1440.51 1805.43,1443.51 1811.43,1443.51 1814.43,1440.51 1814.43,1434.8 1817.43,1431.8 1823.43,1431.8 1826.43,1434.8 1826.43,1439.33 1829.43,1442.33 1835.43,1442.33 1838.43,1439.33 1838.43,1437.17 1841.43,1434.17 1847.43,1434.17 1850.43,1437.17 1850.43,1440.17 1853.43,1443.17 1859.43,1443.17 1862.43,1440.17 1865.43,1437.17 1867.85,1437.17 1908.74,1437.17 1913.47,1441.91 1926.86,1441.91 1934.61,1434.16 1934.61,1417.23 1942.35,1409.49 1968.47,1409.49 v1(1981.97,1422.99)
  Mid-Layer 3 w4: v1(1335.32,1419.3) 1322.71,1431.91 1322.71,1458.33 1331.21,1466.83 1334.12,1466.83 1339.78,1466.83 1351.12,1455.49 1351.12,1425.66 1354.12,1422.66 1360.12,1422.66 1363.12,1425.66 1363.12,1458.5 1366.12,1461.5 1372.12,1461.5 1375.12,1458.5 1375.12,1425.69 1378.12,1422.69 1384.12,1422.69 1387.12,1425.69 1387.12,1458.5 1390.12,1461.5 1396.12,1461.5 1399.12,1458.5 1399.12,1428.42 1402.12,1425.42 1408.12,1425.42 1411.12,1428.42 1411.12,1436.64 1414.12,1439.64 1420.12,1439.64 1423.12,1436.64 1423.12,1435.51 1426.12,1432.51 1432.12,1432.51 1435.12,1435.51 1435.12,1439.65 1438.12,1442.65 1444.12,1442.65 1447.12,1439.65 1447.12,1436.16 1450.12,1433.16 1456.12,1433.16 1459.12,1436.16 1459.12,1436.64 1462.12,1439.64 1468.12,1439.64 1471.12,1436.64 1471.12,1425.81 1474.12,1422.81 1480.12,1422.81 1483.12,1425.81 1483.12,1433.89 1486.12,1436.89 1491.86,1436.89 1585.65,1436.89 1623.71,1398.83 1623.71,1388.83 1619.71,1384.83 1609.19,1384.83 1607.09,1386.93 1607.09,1397.22 1602.09,1402.22 1595.09,1402.22 1588.64,1395.78 1578.76,1395.78 1562.79,1411.74 v1(1562.79,1420.16)
FMC_A7: U10_U_SDRAM1.H1 U10_U_SDRAM2.H1 U13.P7 | length 1448.8
  Top Layer w4: U13.P7@1211.42,1357.17 1226.71,1341.87 1226.71,1318.83 1217.71,1309.83 1201.71,1309.83 1195.68,1315.86 1195.68,1397.8 1202.71,1404.83 1221.71,1404.83 1227.71,1398.83 1227.71,1380.91 1235.71,1372.91 1252.71,1372.91 1258.71,1378.91 1258.71,1396.83 1266.71,1404.83 1281.71,1404.83 1289.71,1396.83 1289.71,1379.91 1296.71,1372.91 1317.71,1372.91 1321.71,1376.91 1321.71,1396.83 1329.71,1404.83 1342.71,1404.83 1351.71,1395.83 1351.71,1378.91 1357.71,1372.91 1374.17,1372.91 1388.18,1372.91 1391.18,1369.91 1391.18,1352.33 1394.18,1349.33 1400.18,1349.33 1403.18,1352.33 1403.18,1377.22 1406.18,1380.22 1412.18,1380.22 1415.18,1377.22 1415.18,1352.33 1418.18,1349.33 1424.18,1349.33 1427.18,1352.33 1427.18,1398.11 1430.18,1401.11 1436.18,1401.11 1439.18,1398.11 1439.18,1352.33 1442.18,1349.33 1448.18,1349.33 1451.18,1352.33 1451.18,1398.11 1454.18,1401.11 1460.18,1401.11 1463.18,1398.11 1463.18,1352.33 1466.18,1349.33 1472.18,1349.33 1475.18,1352.33 1475.18,1377.27 1478.18,1380.27 1484.18,1380.27 1487.18,1377.27 1487.18,1375.91 1490.18,1372.91 1499.69,1372.91 1542.8,1372.91 1546.71,1376.83 1546.71,1400.83 1542.71,1404.83 1515.97,1404.83 v1(1499.8,1388.66)
  Bottom Layer w4: v1(1499.8,1388.66) 1499.8,1389.64 1515.48,1405.31 1874.91,1405.31 1887.76,1392.47 1917.99,1392.47 v1(1918.98,1391.49)
FMC_A8: U10_U_SDRAM1.H2 U10_U_SDRAM2.H2 U13.P8 | length 1340.3
  Mid-Layer 4 w4: v1(1211.42,1388.66) 1227.71,1404.95 1227.71,1427.83 1235.71,1435.83 1249.71,1435.83 1258.71,1426.83 1258.71,1407.83 1261.71,1404.83 1283.71,1404.83 1288.71,1409.83 1288.71,1427.83 1297.71,1436.83 1312.71,1436.83 1320.71,1428.83 1320.71,1410.83 1326.71,1404.83 1345.71,1404.83 1349.71,1408.83 1349.71,1425.83 1357.93,1434.05 1371.73,1434.05 1379.84,1425.94 1379.84,1412.79 1387.68,1404.96 1399.68,1404.96 1406.71,1411.99 1406.71,1427.83 1412.71,1433.83 1433.71,1433.83 1439.71,1427.83 1439.71,1410.86 1439.71,1408.86 1442.71,1405.86 1466.81,1405.86 1469.81,1402.86 1469.81,1396.86 1466.81,1393.86 1438.05,1393.86 1435.05,1390.86 1435.05,1384.86 1438.05,1381.86 1466.81,1381.86 1469.81,1378.86 1469.81,1372.86 1466.81,1369.86 1438.05,1369.86 1435.05,1366.86 1435.05,1360.86 1438.05,1357.86 1466.81,1357.86 1469.81,1354.86 1469.81,1348.86 1466.81,1345.86 1438.05,1345.86 1435.05,1342.86 1435.05,1336.86 1438.05,1333.86 1456.44,1333.86 1459.44,1330.86 1459.44,1324.86 1456.44,1321.86 1447.05,1321.86 1444.05,1318.86 1444.05,1314.62 1447.52,1311.15 1449.9,1308.77 1504.93,1308.77 1515.71,1319.55 1515.71,1373.07 v1(1531.29,1388.66) 1532.28,1388.66 1548.28,1372.66 1637.23,1372.66 1668.47,1341.42 1770.91,1341.42 1805.65,1376.16 1934.75,1376.16 v1@1950.08,1391.49
  other v1: 1950.47,1391.49
FMC_A9: U10_U_SDRAM1.J3 U10_U_SDRAM2.J3 U13.R9 | length 1484.9
  Top Layer w4: U13.R9@1242.91,1420.16 1258.66,1435.91 1310.5,1435.91 1336.5,1435.91 1339.5,1438.91 1339.5,1441 1342.5,1444 1348.5,1444 1351.5,1441 1351.5,1417.79 1354.5,1414.79 1360.5,1414.79 1363.5,1417.79 1363.5,1441 1366.5,1444 1372.5,1444 1375.5,1441 1375.5,1417.79 1378.5,1414.79 1384.5,1414.79 1387.5,1417.79 1387.5,1441 1390.5,1444 1396.5,1444 1399.5,1441 1399.5,1429.51 1402.5,1426.51 1408.5,1426.51 1411.5,1429.51 1411.5,1432.91 1414.5,1435.91 1468.5,1435.91 1471.5,1432.91 1471.5,1417.79 1474.5,1414.79 1480.5,1414.79 1483.5,1417.79 1483.5,1432.91 1486.5,1435.91 1495.65,1435.91 1562.18,1435.91 1576.18,1435.91 1579.18,1432.91 1579.18,1431.03 1582.18,1428.03 1588.18,1428.03 1591.18,1431.03 1591.18,1456.9 1594.18,1459.9 1600.18,1459.9 1603.18,1456.9 1603.18,1431.03 1606.18,1428.03 1612.18,1428.03 1615.18,1431.03 1615.18,1456.9 1618.18,1459.9 1624.18,1459.9 1627.18,1456.9 1627.18,1437.43 1635.65,1428.97 1635.71,1428.91 1635.71,1420.24 1635.71,1413.07 1632.71,1410.07 1593.43,1410.07 1590.43,1407.07 1590.43,1401.07 1593.43,1398.07 1638.21,1398.07 1641.21,1395.07 1641.21,1389.07 1638.21,1386.07 1593.43,1386.07 1590.43,1383.07 1590.43,1377.07 1593.43,1374.07 1631.8,1374.07 1634.8,1371.07 1634.8,1366.83 1632.8,1364.83 1625.8,1357.83 1563.46,1357.83 v1(1562.79,1357.16)
  Mid-Layer 2 w4: v1(1562.79,1357.16) 1563.78,1357.16 1576.63,1344.3 1589.37,1344.3 1591.37,1344.3 1594.37,1347.3 1594.37,1349.72 1597.37,1352.72 1603.37,1352.72 1606.37,1349.72 1606.37,1339.86 1609.37,1336.86 1615.37,1336.86 1618.37,1339.86 1618.37,1349.72 1621.37,1352.72 1627.37,1352.72 1630.37,1349.72 1630.37,1339.86 1633.37,1336.86 1639.37,1336.86 1642.37,1339.86 1642.37,1349.72 1645.37,1352.72 1651.37,1352.72 1654.37,1349.72 1654.37,1344.38 1657.37,1341.38 1665.47,1341.38 1779.36,1341.38 1782.28,1344.3 1965.3,1344.3 1980.98,1359.99 v1(1981.97,1359.99)
FMC_A10: U10_U_SDRAM1.G7 U10_U_SDRAM2.G7 U13.T8 | length 1337.2
  Mid-Layer 3 w4: v1(1274.41,1388.66) 1291.14,1405.39 1291.14,1460.51 1299.02,1468.39 1312.8,1468.39 1319.69,1475.28 1319.69,1494.06 1326.49,1500.87 1348.71,1500.87 1362.71,1500.87 1365.71,1497.87 1365.71,1479.5 1368.71,1476.5 1374.71,1476.5 1377.71,1479.5 1377.71,1501.87 1380.71,1504.87 1386.71,1504.87 1389.71,1501.87 1389.71,1497.98 1392.71,1494.98 1398.71,1494.98 1401.71,1497.98 1401.71,1501.87 1404.71,1504.87 1410.71,1504.87 1413.71,1501.87 1413.71,1500.13 1416.71,1497.13 1422.71,1497.13 1425.71,1500.13 1425.71,1501.87 1428.71,1504.87 1434.71,1504.87 1437.71,1501.87 1437.71,1479.5 1440.71,1476.5 1446.71,1476.5 1449.71,1479.5 1449.71,1501.87 1452.71,1504.87 1458.71,1504.87 1461.71,1501.87 1461.71,1479.5 1464.71,1476.5 1470.71,1476.5 1473.71,1479.5 1473.71,1497.87 1476.71,1500.87 1506.71,1500.87 1509.71,1497.87 1509.71,1494.95 1512.71,1491.95 1518.71,1491.95 1521.71,1494.95 1521.71,1497.87 1524.71,1500.87 1554.71,1500.87 1557.71,1497.87 1557.71,1479.5 1560.71,1476.5 1566.71,1476.5 1569.71,1479.5 1569.71,1500.17 1572.71,1503.17 1578.71,1503.17 1581.71,1500.17 1581.71,1478.66 1584.71,1475.66 1590.71,1475.66 1593.71,1478.66 1593.71,1497.87 1596.71,1500.87 1601.12,1500.87 1608.07,1500.87 1617.87,1491.06 1619.29,1489.64 1623.53,1489.64 1626.17,1492.29 1630.42,1492.29 1634.66,1488.04 1634.66,1483.8 1622.38,1471.52 1622.38,1467.28 1626.62,1463.04 1630.86,1463.04 1643.14,1475.32 1647.39,1475.32 1651.63,1471.07 1651.63,1466.83 1639.35,1454.55 1639.35,1450.31 1643.59,1446.07 1647.83,1446.07 1660.11,1458.35 1664.36,1458.35 1668.6,1454.1 1668.6,1449.86 1665.96,1447.22 1665.96,1442.97 1668.91,1440.02 v1(1688.77,1420.16)
  Mid-Layer 4 w4: v1(1688.77,1420.16) 1689.76,1420.16 1703.62,1406.3 1775.39,1406.3 1803.94,1434.84 1803.94,1434.92 1807.87,1438.86 2028.35,1438.86 2044.22,1422.99 v1(2107.95,1422.99)
FMC_A11: U10_U_SDRAM1.H9 U10_U_SDRAM2.H9 U13.U8 | length 1306.7
  Bottom Layer w4: v1(1305.91,1388.66) 1319.71,1374.86 1319.71,1342.83 1322.11,1340.42 1324.11,1338.42 1328.36,1338.42 1331.36,1341.42 1331.36,1341.65 1334.36,1344.65 1340.36,1344.65 1343.36,1341.65 1343.36,1325.91 1346.36,1322.91 1352.36,1322.91 1355.36,1325.91 1355.36,1341.65 1358.36,1344.65 1364.36,1344.65 1367.36,1341.65 1367.36,1325.91 1370.36,1322.91 1376.36,1322.91 1379.36,1325.91 1379.36,1346.51 1382.36,1349.51 1388.36,1349.51 1391.36,1346.51 1391.36,1325.91 1394.36,1322.91 1400.36,1322.91 1403.36,1325.91 1403.36,1348.28 1406.36,1351.28 1412.36,1351.28 1415.36,1348.28 1415.36,1325.91 1418.36,1322.91 1424.36,1322.91 1427.36,1325.91 1427.36,1348.28 1430.36,1351.28 1436.36,1351.28 1439.36,1348.28 1439.36,1325.91 1442.36,1322.91 1448.36,1322.91 1451.36,1325.91 1451.36,1348.28 1454.36,1351.28 1460.36,1351.28 1463.36,1348.28 1463.36,1325.91 1466.36,1322.91 1472.36,1322.91 1475.36,1325.91 1475.36,1348.28 1478.36,1351.28 1484.36,1351.28 1487.36,1348.28 1487.36,1342.83 1490.36,1339.83 1508.36,1339.83 1511.36,1336.83 1511.36,1336.21 1514.36,1333.21 1520.36,1333.21 1523.36,1336.21 1523.36,1340.66 1526.36,1343.66 1532.36,1343.66 1535.36,1340.66 1535.36,1328.01 1538.36,1325.01 1544.36,1325.01 1547.36,1328.01 1547.36,1340.66 1550.36,1343.66 1556.36,1343.66 1559.36,1340.66 1559.36,1329.33 1562.36,1326.33 1568.36,1326.33 1571.36,1329.33 1571.36,1346.47 1577.64,1352.76 1598.18,1373.3 1736.4,1373.3 v1(1751.76,1388.66) 1753.47,1390.37 1871.16,1390.37 1884.76,1376.77 2009.76,1376.77 2025.35,1392.37 2110.15,1392.37 2125.72,1407.94 2155.47,1407.94 2170.94,1392.47 v1(2170.94,1391.49)
FMC_A12: U10_U_SDRAM1.H3 U10_U_SDRAM2.H3 U13.H16 | length 1352.7
  Mid-Layer 2 w4: v1(1022.44,1640.63) 1038.26,1656.45 1376.7,1656.45 1391.54,1641.61 1391.54,1602.38 1391.54,1588.38 1388.54,1585.38 1386.78,1585.38 1383.78,1582.38 1383.78,1576.38 1386.78,1573.38 1388.6,1573.38 1391.6,1570.38 1391.6,1564.38 1388.6,1561.38 1386.78,1561.38 1383.78,1558.38 1383.78,1552.38 1386.78,1549.38 1388.6,1549.38 1391.6,1546.38 1391.6,1540.38 1388.6,1537.38 1386.78,1537.38 1383.78,1534.38 1383.78,1528.38 1386.78,1525.38 1388.6,1525.38 1391.6,1522.38 1391.6,1516.38 1388.6,1513.38 1386.78,1513.38 1383.78,1510.38 1383.78,1504.38 1386.78,1501.38 1390.45,1501.38 1393.45,1498.38 1393.45,1492.38 1390.45,1489.38 1386.78,1489.38 1383.78,1486.38 1383.78,1480.38 1386.78,1477.38 1394.54,1477.38 1397.54,1474.38 1397.54,1468.38 1394.54,1465.38 1386.78,1465.38 1383.78,1462.38 1383.78,1456.38 1386.78,1453.38 1394.54,1453.38 1397.54,1450.38 1397.54,1444.38 1394.54,1441.38 1386.78,1441.38 1383.78,1438.38 1383.78,1432.38 1386.78,1429.38 1388.54,1429.38 1391.54,1426.38 1391.54,1419.86 1391.54,1389.65 v1(1392.52,1388.66)
  Mid-Layer 3 w4: v1(1392.52,1388.66) 1392.52,1389.65 1406.51,1403.64 1547.81,1403.64 v1(1562.79,1388.66)
  Mid-Layer 4 w4: v1(1562.79,1388.66) 1649.79,1388.66 1665.54,1372.91 1776.31,1372.91 1810.76,1407.36 1966.34,1407.36 v1@1982.09,1391.61
  other v1: 1981.97,1391.49
FMC_A13: U13.H15
FMC_A14: U10_U_SDRAM1.J7 U10_U_SDRAM2.J7 U13.H14 | length 1418.5
  Mid-Layer 2 w4: v1(1022.44,1577.64) 1037.2,1592.4 1336.89,1592.4 1360.71,1568.58 1360.71,1383.42 v1(1335.43,1358.15)
  Mid-Layer 3 w4: v1(1335.43,1358.15) 1352.17,1341.42 1673.03,1341.42 v1(1688.77,1357.16) 1704.19,1341.74 1772.76,1341.74 1774.41,1343.39 ; 1774.41,1343.78 1796.06,1343.78 1798.06,1343.78 1801.06,1346.78 1801.06,1351.36 1804.06,1354.36 1810.06,1354.36 1813.06,1351.36 1813.06,1345.33 1816.06,1342.33 1822.06,1342.33 1825.06,1345.33 1825.06,1351.36 1828.06,1354.36 1834.06,1354.36 1837.06,1351.36 1837.06,1345.33 1840.06,1342.33 1846.06,1342.33 1849.06,1345.33 1849.06,1348.63 1852.06,1351.63 1858.06,1351.63 1861.06,1348.63 1861.06,1346.78 1864.06,1343.78 1867.91,1343.78 2046.23,1343.78 2063.43,1360.97 2106.96,1360.97 v1(2107.95,1359.99)
FMC_A15: U10_U_SDRAM1.H8 U10_U_SDRAM2.H8 U13.G14 | length 1404.4
  Mid-Layer 2 w4: v1(990.95,1577.64) 1007.68,1560.91 1028.83,1560.91 1033.71,1565.79 1043.83,1565.79 1048.71,1560.91 1060.32,1560.91 1065.2,1565.79 1075.32,1565.79 1079.03,1562.08 ; 1079.59,1561.52 1080.2,1560.91 1091.82,1560.91 1096.7,1565.79 1106.82,1565.79 1111.7,1560.91 1123.32,1560.91 1128.2,1565.79 1138.32,1565.79 1143.2,1560.91 1154.81,1560.91 1159.69,1565.79 1169.81,1565.79 1174.69,1560.91 1186.31,1560.91 1191.19,1565.79 1201.31,1565.79 1206.19,1560.91 1217.8,1560.91 1222.69,1565.79 1232.8,1565.79 1237.69,1560.91 1249.3,1560.91 1254.18,1565.79 1264.3,1565.79 1269.18,1560.91 1280.8,1560.91 1285.68,1565.79 1295.8,1565.79 1300.68,1560.91 1321.65,1560.91 1335.43,1547.13 v1(1335.43,1484.13)
  Mid-Layer 3 w4: v1(1335.43,1484.13) 1350.56,1469 1578.26,1469 1591.07,1456.19 1592.49,1454.77 1600.97,1454.77 1605.21,1450.53 1605.21,1446.29 1600.97,1442.05 1600.97,1437.8 1605.21,1433.56 1609.46,1433.56 1613.7,1437.8 1617.94,1437.8 1622.18,1433.56 1622.18,1429.32 1617.94,1425.08 1617.94,1420.83 1622.18,1416.59 1626.43,1416.59 1630.67,1420.83 1634.91,1420.83 1639.16,1416.59 1639.16,1412.35 1634.91,1408.11 1634.91,1403.86 1639.16,1399.62 1643.4,1399.62 1647.64,1399.62 1656.6,1390.66 1658.6,1388.66 v1(1720.27,1388.66) 1721.26,1388.66 1737,1372.91 1787.2,1372.91 1789.17,1374.88 ; 1789.17,1374.8 1799.02,1374.8 1801.02,1374.8 1804.02,1377.8 1804.02,1382.55 1807.02,1385.55 1813.02,1385.55 1816.02,1382.55 1816.02,1376.49 1819.02,1373.49 1825.02,1373.49 1828.02,1376.49 1828.02,1382.55 1831.02,1385.55 1837.02,1385.55 1840.02,1382.55 1840.02,1376.49 1843.02,1373.49 1849.02,1373.49 1852.02,1376.49 1852.02,1379.54 1855.02,1382.54 1861.02,1382.54 1864.02,1379.54 1864.02,1377.8 1867.02,1374.8 1872.83,1374.8 2097.75,1374.8 2115.42,1392.47 2138.46,1392.47 v1(2139.45,1391.49)